# Altium PCB steering-wheel.PcbDoc
Units mm, origin at the board's own origin, x right, y up, seen from the top; angles counter-clockwise.
Board outline 106.25 x 90.25 mm, 2 copper layers (Top Layer, Bottom Layer), stack 1.671 mm thick; 77 components, 62 nets, 238 pads, 89 vias.
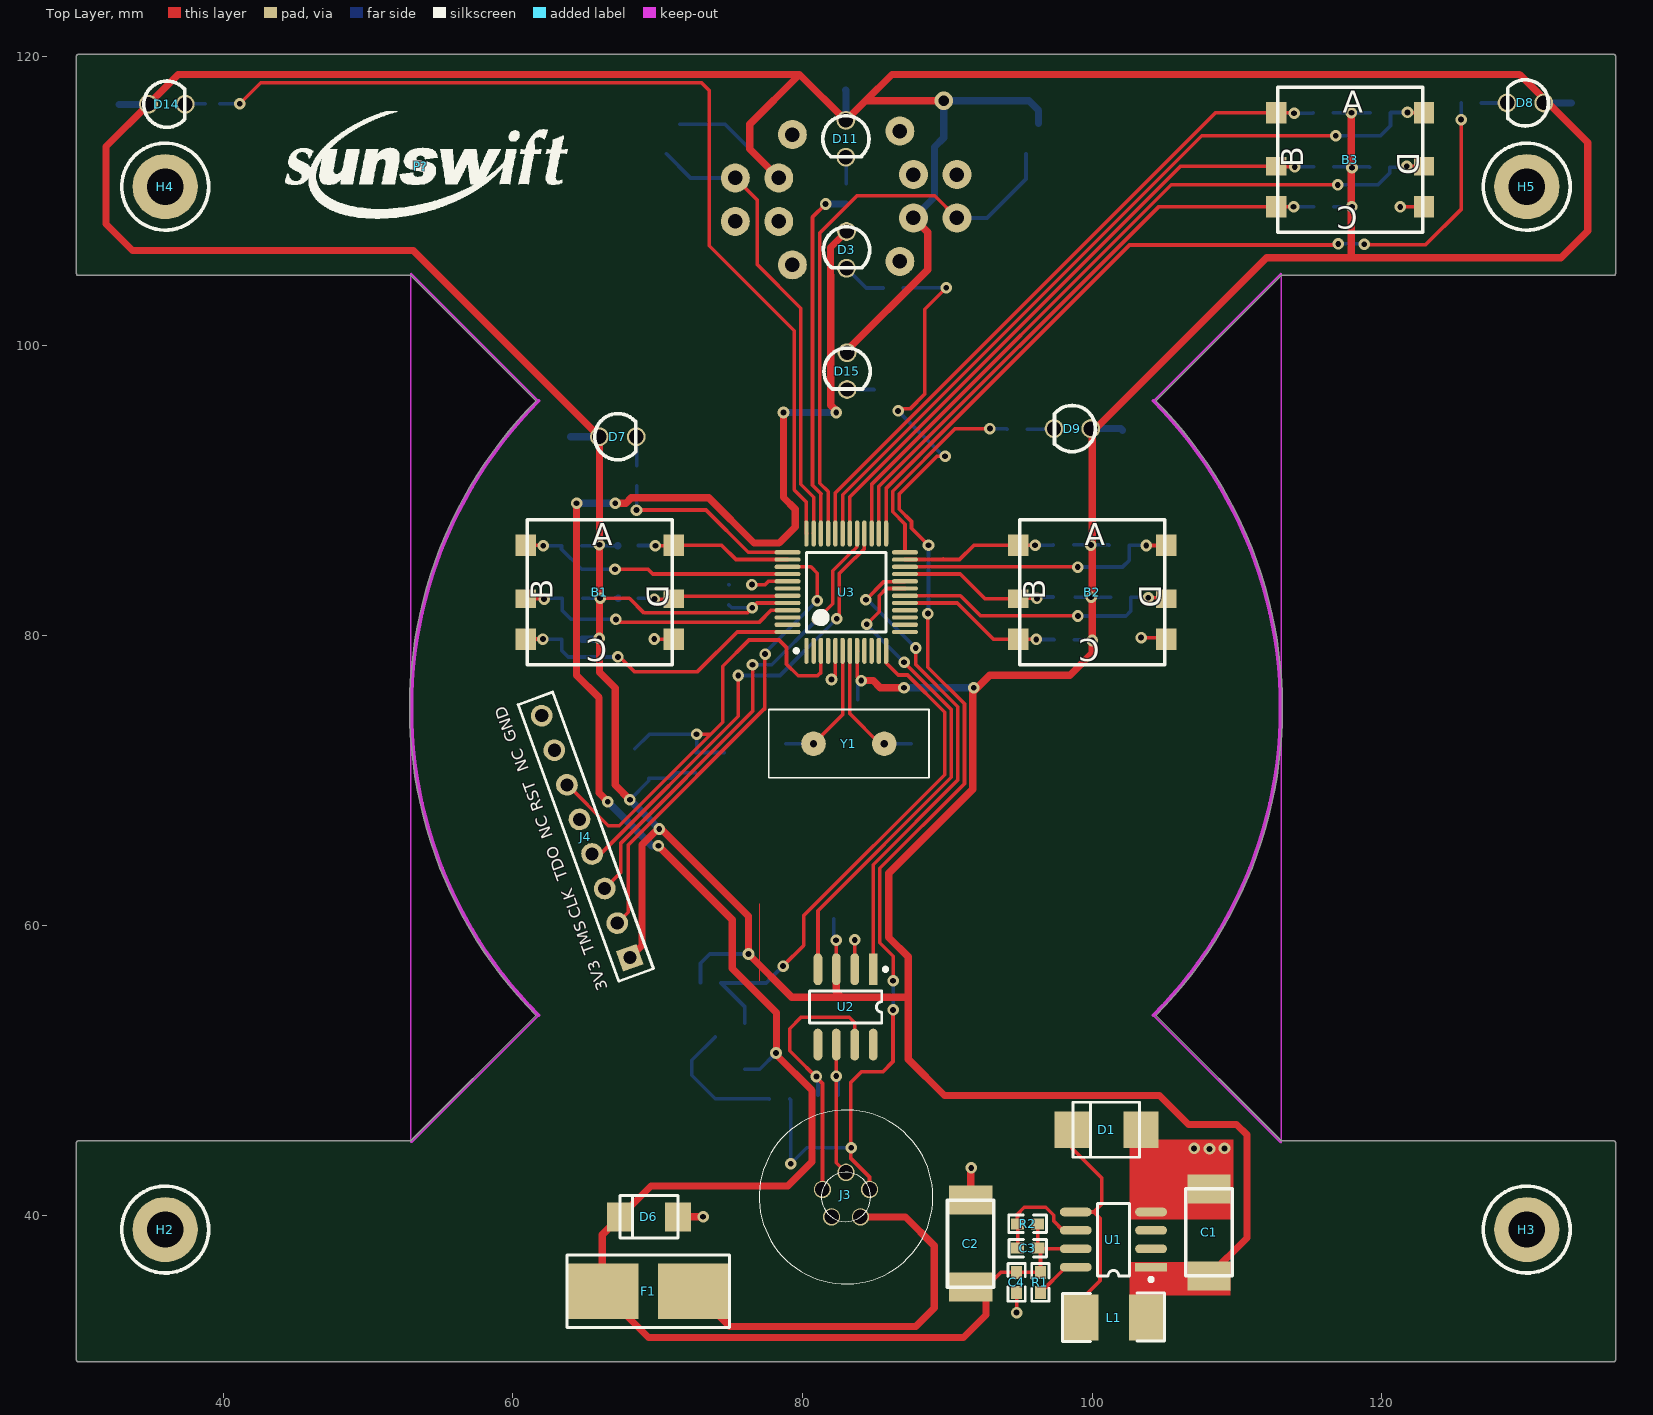
[diagram p0: Top Layer view]
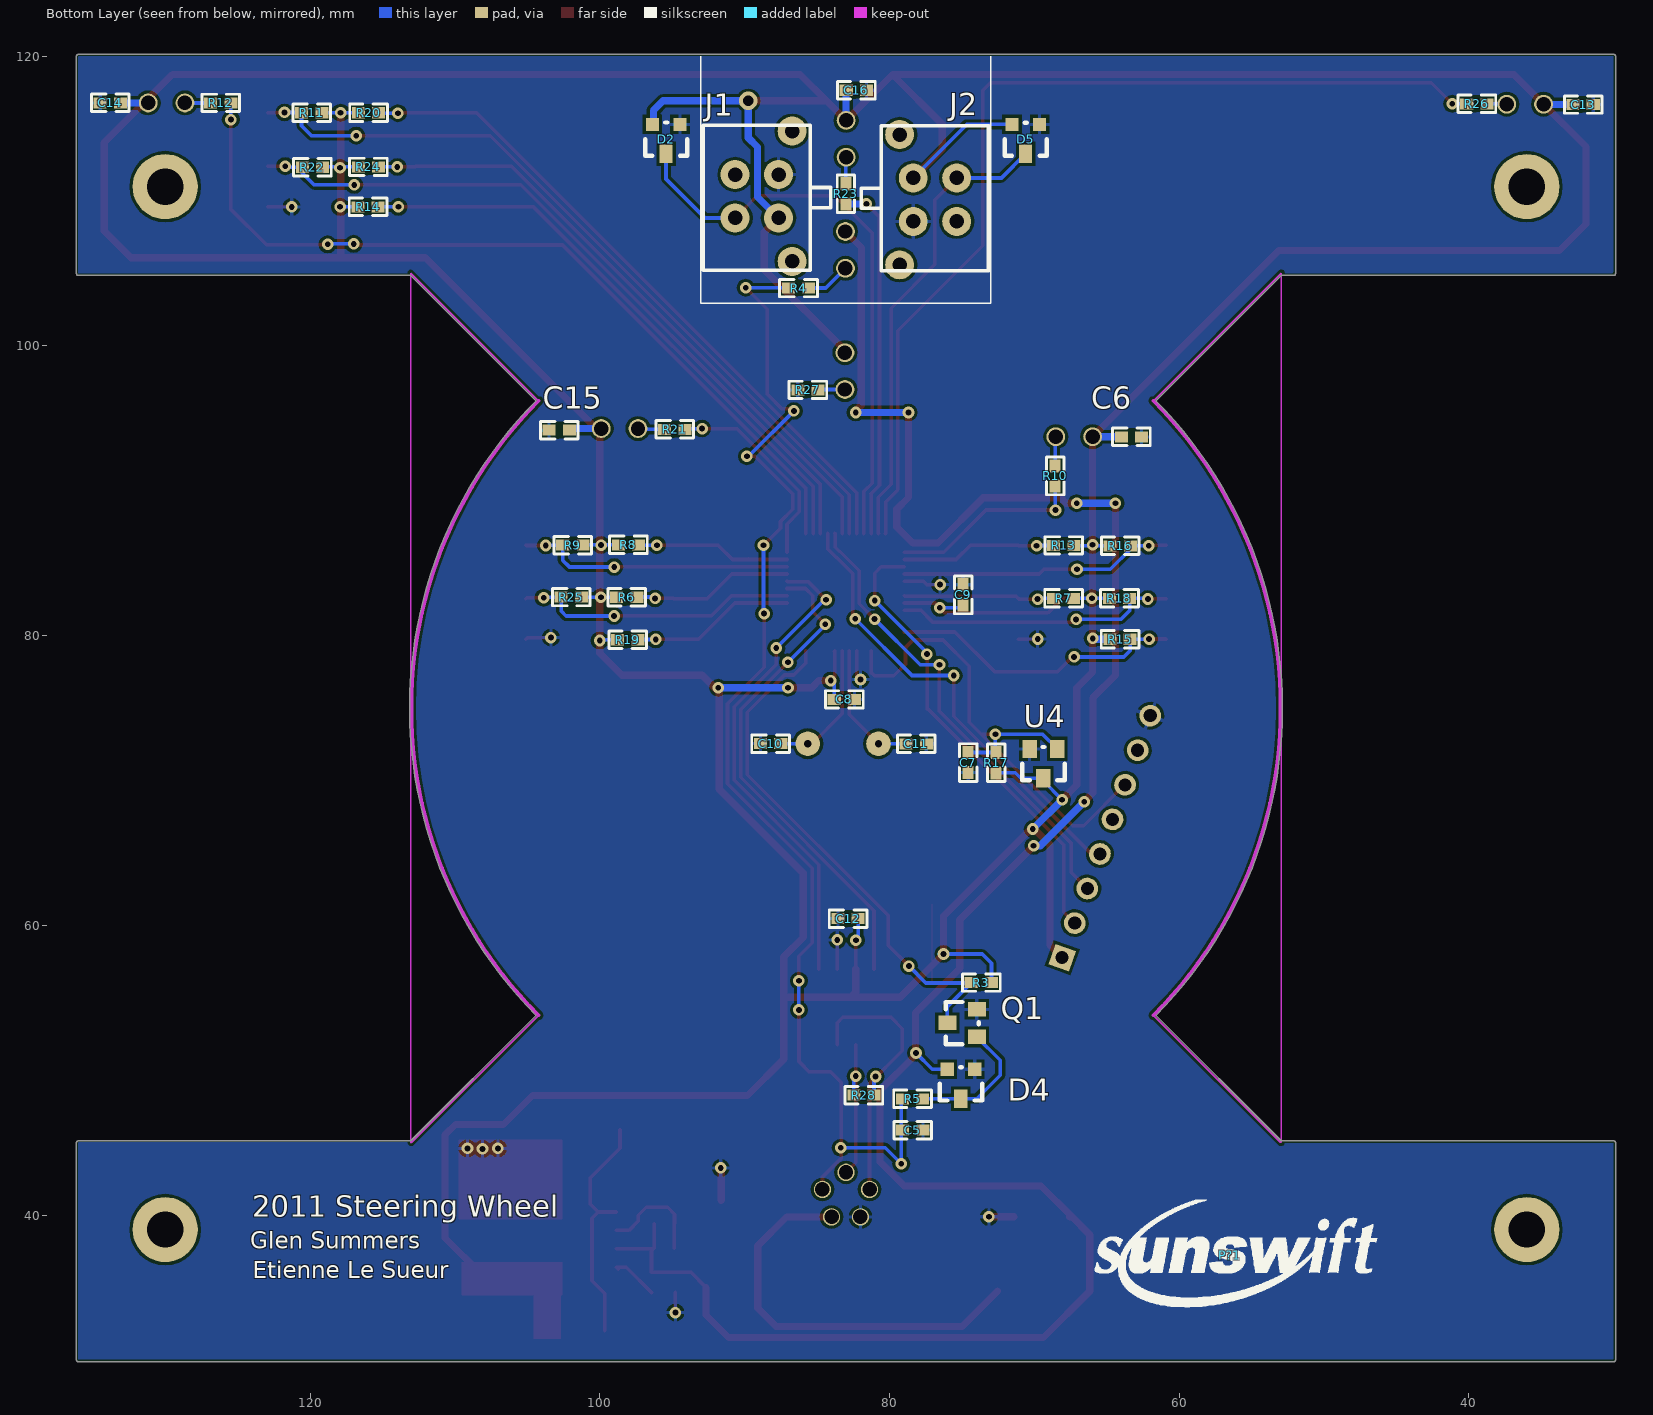
[diagram p1: Bottom Layer view, seen from below]

## Layer stack, top to bottom
Top Layer: signal copper 0.0356
Dielectric: core 1.6, FR-4, Dk 4.8
Bottom Layer: signal copper 0.0356

## Board outline
30,29.873 cw(c30,30) 29.873,30 29.873,45 cw(c30,45) 30,45.127 52.947,45.127 61.607,53.787 cw(c83,75) 61.607,96.213 52.947,104.873 30,104.873 cw(c30,105) 29.873,105 29.873,120 cw(c30,120) 30,120.127 136,120.127 cw(c136,120) 136.127,120 136.127,105 cw(c136,105) 136,104.873 113.053,104.873 104.393,96.213 cw(c83,75) 113.127,75 cw(c83,75) 104.393,53.787 113.053,45.127 136,45.127 cw(c136,45) 136.127,45 136.127,30 cw(c136,30) 136,29.873

## Design rules (kind name [scope] priority, off if disabled: settings)
Clearance [All] p1: gap=0.2
ComponentClearance [All] p1: gap=0.1 collisioncheckmode=3 verticalgap=0.254 showdistances=FALSE
PolygonConnect [All] p1: connectstyle=Relief reliefconductorwidth=0.254 reliefentries=4 polygonreliefangle="90 Angle"
RoutingVias [All] p1: holewidth=0.4 width=0.8 viastyle="Through Hole" minholewidth=0.4 minwidth=0.8 maxholewidth=0.4 maxwidth=0.8
SilkscreenOverComponentPads [All] p1: minsilkscreentomaskgap=0.254
SolderMaskExpansion [All] p1: expansion=0.102
Width [All] p1: maxlimit=5 minlimit=0.254 preferedwidth=0.254 minimp=50.000000 maximp=50.000000 favimp=50.000000
26 further rules are at their usual default settings.

## Classes and differential pairs
component class LPC: C7 C8 C9 C10 C11 C12 C13 C14 C15 C16 C27 J4 R17 U3 U4 Y1
component class PWR: C6 D6 F1 J3 R28 U2
component class steering-wheel: D7 D8 D9 D11 D14 D15 H2 H3 H4 H5 P2 R10 R12 R21 R23 R26 R27
component class U_3V-Switcher-50mA: C1 C2 C3 C4 D1 L1 R1 R2 U1
component class U_buttons: B1 B2 B3 R6 R7 R8 R9 R11 R13 R14 R15 R16 R18 R19 R20 R22 R24 R25
component class U_IO: C5 D2 D3 D4 D5 J1 J2 Q1 R3 R4 R5

## Components (designator, comment, footprint, x,y, rotation, side; value= is the part's Value field where it differs from the comment)
B1 "SKQU" SKQU 66,83 r0 top
B2 "SKQU" SKQU 100,83 r0 top
B3 "SKQU" SKQU 117.807,112.854 r0 top
C1 "4u7 35V" MCCT-CASEC 108.061,35.809 r90 top
C2 "4u7 35V" MCCT-CASEC 91.606,35.027 r90 top
C3 "1n" 0603 96.252,37.717 r180 top
C4 "100nF" 0603 94.777,36.051 r270 top
C5 "100nF" 0603 79.089,45.864 r180 bottom
C6 "100nF" 0603 62.597,93.727 r0 bottom
C7 "10nF" 0603 74.564,71.942 r270 bottom
C8 "100nF" 0603 83.81,75.6 r180 bottom
C9 "100nF" 0603 74.912,83.517 r270 bottom
C10 "18pF" 0603 87.505,72.549 r0 bottom
C11 "18pF" 0603 78.853,72.535 r180 bottom
C12 "CAP" 0603 82.159,60.467 r0 bottom
C13 "CAP" 0603 32.811,116.668 r180 bottom
C14 "CAP" 0603 133.091,116.783 r0 bottom
C15 "CAP" 0603 102.096,94.186 r0 bottom
C16 "CAP" 0603 82.983,117.656 r180 bottom
D1 "D SCHOTTKY" SMB 100.984,45.891 r180 top
D2 "BAV99" "dual  diode" 95.36,114.499 r180 bottom
D3 "Brake LED" "3mm LED" 83.036,106.804 r0 top
D4 "BAV99" "dual  diode" 75.01,49.271 r180 bottom
D5 "BAV99" "dual  diode" 70.536,114.499 r180 bottom
D6 "12V Transient Suppressor" SMA 69.397,39.881 r180 top
D7 "DIODE" "3m Diode" 65.875,90.036 r90 top
D8 "DIODE" "3mm LED" 130.074,116.779 r270 top
D9 "DIODE" "3m Diode" 100,98 r270 top
D11 "DIODE" "3m Diode" 79.292,115.674 r0 top
D14 "DIODE" "3m Diode" 34.743,112.991 r90 top
D15 "DIODE" "3m Diode" 79.372,99.636 r0 top
F1 "125mA/3A" LITTELFUSE-154 69.352,34.744 r180 top
H2 "HOLE" M2.5 36,39 r0 top
H3 "HOLE" M2.5 130,39 r0 top
H4 "HOLE" M2.5 36,111 r0 top
H5 "HOLE" M2.5 130,111 r0 top
J1 "CON4" MICROFIT-4-VERT 90.658,111.838 r270 bottom
J2 "CON4" MICROFIT-4-VERT 75.358,108.6 r90 bottom
J3 "CON5" ENG.1B.305.CLL 83,41.25 r0 top
J4 "LPC SWD Connector" HDR1X8 68.076,57.771 r110 top
L1 "330uH" 1812 99.229,32.926 r0 top
P? "SUN_LOGO" SUNSWIFTLOGO 53.597,112.404 r0 top
P?1 "SUN_LOGO" SUNSWIFTLOGO 56.515,37.214 r180 bottom (schematic designator P?)
Q1 "2N7002" SOT23-3 73.968,52.3 r90 bottom
R1 "100k" 0603 96.427,34.651 r90 top
R2 "1R2" 0603 96.234,39.396 r180 top
R3 "10k" 0603 74.353,56.05 r180 bottom
R4 "10k" 0603 85.577,104 r0 bottom
R5 "10k" 0603 79.106,48.029 r180 bottom
R6 "10k" 0603 98.838,82.653 r180 bottom
R7 "10k" 0603 67.279,82.581 r0 bottom
R8 "10k" 0603 97.319,86.271 r0 bottom
R9 "10k" 0603 101.158,86.249 r0 bottom
R10 "1K" 0603 68.56,90.332 r90 bottom
R11 "10k" 0603 119.191,116.103 r0 bottom
R12 "1K" 0603 125.47,116.779 r0 bottom
R13 "10k" 0603 67.264,86.23 r0 bottom
R14 "10k" 0603 116.692,109.607 r180 bottom
R15 "10K" 0603 64.78,79.755 r180 bottom
R16 "10k" 0603 64.762,86.204 r180 bottom
R17 "10k" 0603 72.632,71.934 r270 bottom
R18 "10k" 0603 64.818,82.576 r180 bottom
R19 "10k" 0603 98.761,79.72 r180 bottom
R20 "10k" 0603 116.661,116.103 r180 bottom
R21 "1K" 0603 94.118,94.246 r0 bottom
R22 "10k" 0603 119.139,112.339 r0 bottom
R23 "1K" 0603 83.007,109.803 r90 bottom
R24 "10k" 0603 115.269,112.363 r0 bottom
R25 "10k" 0603 101.265,82.664 r0 bottom
R26 "1K" 0603 40.145,116.719 r180 bottom
R27 "1K" 0603 86.327,96.969 r180 bottom
R28 "RES1" 0603 82.462,48.281 r180 bottom
U1 "LTC1474" SO8 101.461,38.309 r90 top
U2 "SN65HVD232" SO8 82.968,54.369 r180 top
U3 "LPC11C14" QFP48-long 82.33,83.005 r90 top
U4 "XC61CN2002MR" SOT23-3 68.42,72.188 r0 bottom
Y1 "12 MHz" HC49/4H 77.672,72.545 r0 top

## Footprints (in the part's own frame and the unit in brackets; to place one, negate y for a bottom-side part, rotate by r counter-clockwise, add the part's x,y. Pads: shape width x height; smd on the part's side, far side on the other; paste and mask are expansions set on the pad)
"3m Diode" [mm]
  round 1.3 hole 1: A(3.7,-0.1) K(3.7,-2.64)
  silkscreen extent 2.1,-2.6 5.3,0.22
"3mm LED" [mm]
  round 1.3 hole 1: A(0,1.1) K(0,-1.44)
  silkscreen extent -1.6,-1.4 1.6,1.42
0603 [mil]
  rect 35.43x30 smd: 1(0,0) 2(55,0)
  silkscreen extent -24,-24 79,24
1812 [mm]
  rect 2.4x3.2 smd: 1(0,0) 2(4.5,0)
  silkscreen extent -1.27,-1.66 5.77,1.7
"dual  diode" [mil]
  rect 36x36 smd: 1(35.43,31.5) 2(-39.57,31.5)
  rect 36x50 smd: 3(-2.57,-48.5)
  silkscreen extent -60,-54 55,36
ENG.1B.305.CLL [mm]
  round 1.2 hole 1: 1(0,1.7) 2(-1.625,0.525) 3(-1,-1.375) 4(1,-1.375) 5(1.625,0.525)
  silkscreen extent -6,-6 6,6
HC49/4H [mm]
  round 1.7 hole 0.5: 1(3.085,0) 2(7.965,0)
  silkscreen extent 0,-2.35 11.05,2.35
HDR1X8 [mm] "Connector; Header; 8 Position"
  rect 1.5x1.5 hole 0.9: 1(0,0)
  round 1.5 hole 0.9: 2(2.54,0) 3(5.08,0) 4(7.62,0) 5(10.16,0) 6(12.7,0) 7(15.24,0) 8(17.78,0)
  silkscreen extent -1.27,-1.27 19.05,1.27
LITTELFUSE-154 [mm]
  rect 5x3.81 smd: 1(-3.185,0) 2(3.185,0)
  silkscreen extent -5.6,-2.51 5.6,2.5
M2.5 [mm]
  round 4.5 hole 2.5: 1(0,0)
  silkscreen extent -3,-3 3,3
MCCT-CASEC [mm]
  rect 2x3 smd: 1(0,0) 2(6,0)
  silkscreen extent 0,-1.6 6,1.6
MICROFIT-4-VERT [mm]
  round 2 hole 1: 0(-3,3.94) 0(6,3.94) 1(0,0) 2(0,3) 3(3,0) 4(3,3)
  silkscreen extent -3.4,-2.2 6.6,6.6
QFP48-long [mm]
  oval 1.8x0.3 smd: 1(-4.048,2.063) 2(-4.048,1.563) 3(-4.048,1.063) 4(-4.048,0.563) 5(-4.048,0.063) 6(-4.048,-0.437) 7(-4.048,-0.937) 8(-4.048,-1.437) 9(-4.048,-1.937) 10(-4.048,-2.437) 11(-4.048,-2.937) 12(-4.048,-3.437) 25(4.052,-3.437) 26(4.052,-2.937) 27(4.052,-2.437) 28(4.052,-1.937) 29(4.052,-1.437) 30(4.052,-0.937) 31(4.052,-0.437) 32(4.052,0.063) 33(4.052,0.563) 34(4.052,1.063) 35(4.052,1.563) 36(4.052,2.063)
  oval 0.3x1.8 smd: 13(-2.748,-4.737) 14(-2.248,-4.737) 15(-1.748,-4.737) 16(-1.248,-4.737) 17(-0.748,-4.737) 18(-0.248,-4.737) 19(0.252,-4.737) 20(0.752,-4.737) 21(1.252,-4.737) 22(1.752,-4.737) 23(2.252,-4.737) 24(2.752,-4.737) 37(2.752,3.363) 38(2.252,3.363) 39(1.752,3.363) 40(1.252,3.363) 41(0.752,3.363) 42(0.252,3.363) 43(-0.248,3.363) 44(-0.748,3.363) 45(-1.248,3.363) 46(-1.748,3.363) 47(-2.248,3.363) 48(-2.748,3.363)
  silkscreen extent -4.17,-3.44 2.75,2.89, body extent -3.5,-4.19 3.5,2.81, height 1.6
SKQU [mm] "4 way hat switch plus centre push"
  rect 1.4x1.5 smd: 1(-5.1,3.25) 3(-5.1,-3.25) 4(5.1,-3.25) 6(5.1,3.25)
  rect 1.4x1.3 smd: 2(-5.1,-0.45) 5(5.1,-0.45)
  silkscreen extent -5,-5 5,5
SMA [mm]
  rect 1.8x2 smd: A(-2,0) K(2,0)
  silkscreen extent -2,-1.48 2,1.48
SMB [mm]
  rect 2.4x2.5 smd: A(-2.385,0) K(2.385,0)
  silkscreen extent -2.28,-1.9 2.3,1.9
SO8 [mm]
  rect 0.6x2.2 smd: 1(-1.905,-2.6)
  oval 0.6x2.2 smd: 2(-0.635,-2.6) 3(0.635,-2.6) 4(1.905,-2.6) 5(1.905,2.6) 6(0.635,2.6) 7(-0.635,2.6) 8(-1.905,2.6)
  silkscreen extent -2.88,-2.72 2.5,1.1
SOT23-3 [mm]
  rect 1x1.25 smd: 1(0,0) 2(1.905,0) 3(0.965,2.032)
  silkscreen extent -0.51,-0.13 2.41,2.16
SUNSWIFTLOGO [mm] "Sunswift Logo"
  silkscreen extent -9.32,-3.58 10.19,3.81

## Part data
B1 B2 B3: "Multi-directional switch"
C1 C2: library part "Cap Pol3", "Polarized Capacitor (Surface Mount)"
C3 C4 C5 C6 C7 C8 C9 C10 C11: library part CAP, "Capacitor"
C12 C13 C14 C15 C16: "Capacitor"
D1: "Schottky Diode"
D2 D4 D5: "Dual Diode"
D3: library part LED_HOLE, "through hole LED"
D6: library part DIODE, "Diode"
D7 D8 D9 D11 D14 D15: "Diode"
F1: library part FUSE2, "Fuse"
H2 H3 H4 H5: "Hole"
J1 J2 J3: "Connector"
J4: library part LPCLink_Connector
L1: library part Inductor, "Inductor"
Q1: library part N-MOSFET
R1 R2 R10 R12 R17 R21 R23 R26 R27: library part RES1, "Resistor"
R3 R4 R5 R6 R7 R8 R9 R11 R13 R14 R15 R16 R18 R19 R20 R22 R24 R25: library part RES, "Standard Resistor"
R28: "Resistor"
U1: "Step-down converter"
U2: "3.3V CAN Transciever"
U3: library part LPC11C14_Full
U4: library part XC61F, "SOT23 reset generator"
Y1: library part CRYSTAL, "Crystal"

## Via types
v1: diameter 0.8, hole 0.4, Top Layer to Bottom Layer, 88 vias
v2: diameter 1.27, hole 0.711, Top Layer to Bottom Layer, 1 vias

## Nets (pads, with @x,y where several pads share a name; then routed paths per layer and width w, separated by ;. In a path a pad name is that pad's centre, name@x,y a point inside that pad or via, vN(x,y) a via of type N, cw(c..) or ccw(c..) an arc to the next point about the centre after c; other vN are vias at no path point)
3V3: C1.1 C6.2 C8.1 C9.2 C12.1 C13.1 C14.1 C15.1 C16.1 D2.2 D5.2 D7.A D8.A D9.A D11.A D14.A D15.A J1.4 J2.4 J4.1 L1.2 R3.2 R6.1 R7.1 R8.2 R9.1 R11.1 R13.1 R14.1 R15.1 R16.1 R17.2 R18.1 R19.1 R20.1 R22.1 R24.2 R25.1 U1.1 U2.3 U3.8 U3.44 U4.3 | length 493.8
  Top Layer w0: 77.046,56.165 77.046,61.499
  Top Layer w0.254: v1(66.02,82.589) 68.047,82.589 69.063,81.573 76.174,81.573 v1(76.525,81.924) 76.858,82.257 U3.44 ; v1(82.313,58.978) 82.333,58.958 U2.3 U2.3@82.349,56.954 ; U3.8@83.791,78.934 U3.8 83.768,77.188 v1(84.057,76.899) ; C1.1@107.466,36.404 C1.1 ; 117.888,106.163 117.953,106.098 ; v1(117.924,109.607) v1@118.021,109.704
  Top Layer w0.5: J4.1 68.912,58.606 68.912,65.561 70.004,66.653 v1(70.105,66.653) 70.248,66.653 76.268,60.633 v1(76.268,58.026) 79.256,55.038 82.693,55.038 ; v1(68.08,68.678) 67.067,69.691 67.067,76.391 65.975,77.483 D7.A 53.124,106.587 33.748,106.587 31.92,108.415 31.92,113.768 D14.A 36.902,118.75 79.789,118.75 ; J2.4 76.351,113.606 76.351,115.313 79.789,118.75 ; U2.3 82.333,55.397 82.693,55.038 ; D15.A@82.992,99.617 88.637,105.262 88.637,107.859 J1.4 ; D11.A 83.795,116.378 83.798,116.378 ; v1(84.057,76.899) 84.877,76.899 85.37,76.405 v1(87.005,76.405) ; 84.341,116.924 84.343,116.924 ; v2(89.753,116.924) 84.343,116.924 ; v1(91.816,76.405) v1@91.936,76.286 ; D9.A 100.007,94.193 D9.A@100.007,94.069 ; C1.1 110.677,38.425 110.677,45.54 109.96,46.258 106.648,46.258 104.65,48.256 89.8,48.256 87.294,50.761 87.294,55.038 ; 117.888,106.163 v1(117.888,116.103) ; 79.789,118.75 82.98,115.56 83.798,116.378 ; 82.693,55.038 87.294,55.038 ; 83.798,116.378 84.343,116.924 ; 84.343,116.924 86.17,118.75 129.505,118.75 134.204,114.051 134.204,107.938 132.365,106.098 117.953,106.098 112.037,106.098 D9.A@100.007,94.069 ; 87.294,55.038 87.294,57.829 85.958,59.165 85.958,63.608 91.754,69.404 91.754,76.103 92.919,77.269 98.466,77.269 100.007,78.811 v1(100.007,79.665) D9.A@100.007,94.069
  Bottom Layer w0.254: R16.1 R13.1@67.238,86.204 ; R18.1 R7.1@67.274,82.576 ; R7.1@67.075,82.608 R7.1@67.083,82.601 ; v1(68.08,68.678) 69.385,69.984 U4.3 70.934,70.156 71.315,70.537 R17.2 ; D5.2 74.658,115.299 J2.4 ; R3.2 72.956,57.381 73.6,58.026 v1@76.542,58.026 ; C9.2 75.108,81.924 v1(76.525,81.924) ; C12.1 82.159,59.132 v1(82.313,58.978) ; C8.1 83.81,76.653 v1(84.057,76.899) ; R8.2 101.136,86.271 R9.1 ; R19.1 v1@99.952,79.72 ; R6.1 98.849,82.664 R25.1 ; v1@99.821,79.876 v1@99.886,79.811 ; R20.1 v1(117.888,116.103) R11.1 ; R24.2 119.114,112.363 R22.1 ; R14.1 v1(117.924,109.607)
  Bottom Layer w0.5: C13.1 34.82,116.668 D14.A ; C6.2 65.966,93.727 D7.A ; R15.1 65.908,79.755 v1(65.965,79.812) ; R13.1@67.238,86.204 R13.1 ; R7.1@67.274,82.576 R7.1 ; v1(68.08,68.678) v1(70.105,66.653) ; C16.1 82.992,117.647 D11.A ; v1(87.005,76.405) v1(91.816,76.405) ; J1.4 89.109,110.29 89.109,113.74 89.753,114.384 v2(89.753,116.924) 95.638,116.924 96.298,116.263 D2.2@96.298,115.362 ; D9.A 101.982,94.3 C15.1 ; v1@99.952,79.72 v1(100.007,79.665) ; D8.A 131.179,116.783 C14.1
  other v1: 99.919,82.657 99.908,86.254 65.979,86.272 117.934,112.302
12V: C2.1 C3.1 C4.1 D3.A D4.2 D6.K F1.2 R1.2 R2.1 U1.7 | length 158.3
  Top Layer w0.254: C2.1@92.661,35.009 93.701,36.048 C4.1@94.78,36.048 ; C4.1 C4.1@94.78,36.048 ; R2.1 96.234,37.735 C3.1 C3.1@96.296,37.674 ; U1.7 C3.1@96.296,37.674 ; C4.1@94.78,36.048 R1.2 96.427,37.543 C3.1@96.296,37.674
  Top Layer w0.5: v1@64.402,89.159 64.402,77.274 65.957,75.719 65.957,69.133 v1(66.555,68.534) ; v1@67.071,89.272 v1(67.071,89.146) 67.804,89.146 68.182,89.524 73.529,89.524 76.649,86.404 78.383,86.404 79.489,87.51 79.489,88.737 78.687,89.539 v1(78.687,95.406) ; D6.K@67.561,39.881 D6.K ; v1(70.046,65.493) 75.153,60.385 75.153,57.032 78.21,53.975 78.21,51.058 80.657,48.611 80.657,43.69 78.983,42.016 69.532,42.016 D6.K ; v1@82.334,95.531 81.948,95.917 81.948,104.897 81.936,104.908 81.936,106.804 D3.A ; C2.1@92.661,35.009 92.661,33.097 91.108,31.544 69.367,31.544 F1.2 66.167,38.651 D6.K
  Bottom Layer w0.254: D4.2 77.045,50.071 v1(78.167,51.193)
  Bottom Layer w0.5: v1(64.399,89.146) v1(67.071,89.146) ; v1(66.555,68.534) 69.597,65.493 v1(70.046,65.493) ; v1@78.64,95.411 v1(82.334,95.411)
/RESET: C7.1 J4.6 R17.1 U3.3 U4.1 | length 38.4
  Top Layer w0.254: J4.6@63.751,69.723 66.586,66.887 67.352,66.887 73.663,73.198 ; v1(72.686,73.198) 73.663,73.198 ; U3.3 81.268,77.457 81.041,77.23 79.699,77.23 78.894,78.035 78.894,79.184 78.379,79.699 76.296,79.699 74.487,77.89 74.487,74.022 73.663,73.198
  Bottom Layer w0.254: U4.1 69.43,73.198 v1(72.686,73.198) 72.686,71.988 R17.1@72.639,71.942 ; R17.1 R17.1@72.639,71.942 ; C7.1@74.576,71.93 C7.1 R17.1@72.639,71.942
BRAKECUTOUT: C5.1 J3.5 R4.2 R5.1 | length 86.7
  Top Layer w0.254: J3.5 84.625,42.636 83.384,43.877 83.358,43.877 83.323,43.913 83.323,49.158 84.065,49.901 85.551,49.901 86.247,50.597 v1@86.247,54.264 ; v1(86.254,56.174) 86.254,57.87 85.327,58.797 85.327,63.938 91.177,69.787 91.177,75.298 88.65,77.825 88.65,81.525 v1(88.654,81.529) ; v1(86.596,95.518) 86.596,95.658 87.413,95.658 88.435,96.68 88.435,102.535 v1(89.925,104.025) ; v1(88.696,86.24) 87.522,87.414 87.522,87.89 86.676,88.736 86.676,89.784 89.276,92.384 v1(89.839,92.384)
  Bottom Layer w0.254: R5.1 79.182,47.953 v1(79.182,43.545) 80.284,44.647 v1(83.362,44.647) ; v1(86.254,54.165) v1(86.254,56.174) ; v1(86.596,95.518) 89.729,92.384 v1(89.839,92.384) ; R4.2 86.99,104.015 v1@89.925,104.015 ; v1(88.654,81.529) 88.696,81.529 v1(88.696,86.24)
CAN_H: J3.2 R28.2 U2.7 | length 19.8
  Top Layer w0.254: J3.2 81.375,49.088 79.11,51.353 79.11,52.872 79.889,53.65 83.219,53.65 83.603,53.266 U2.7
  Bottom Layer w0.254: v1(80.957,49.569) 81.065,49.461 R28.2
CAN_L: J3.1 R28.1 U2.6 | length 10.5
  Top Layer w0.254: U2.6 82.333,43.617 J3.1
  Bottom Layer w0.254: v1(82.329,49.593) 82.462,49.46 R28.1
CRUISE: R23.1 U3.34 | length 24.8
  Top Layer w0.254: U3.34 81.268,89.785 81.278,89.795 80.689,90.384 80.689,108.897 v1(81.595,109.803)
  Bottom Layer w0.5: v1(81.595,109.803) R23.1
GND: B1.4 B2.4 B3.4 C1.2 C2.2 C4.2 C5.2 C6.1 C7.2 C8.2 C9.1 C10.2 C11.2 C12.2 C13.2 C14.2 C15.2 C16.2 D1.A D2.1 D4.1 D5.1 D6.A J1.2 J2.2 J3.3 J4.8 Q1.2 R27.1 U1.4 U2.2 U3.5 U3.41 U4.2 | length 16.9
  Top Layer w0.254: v1(69.769,79.771) 69.789,79.75 B1.4 ; v1(76.505,83.527) 77.422,83.527 77.652,83.757 U3.41 ; v1(81.997,76.977) 82.268,77.248 U3.5 ; U2.2 v1(83.603,58.996) ; v1(94.777,33.266) C4.2 ; v1(103.37,79.865) 104.985,79.865 B2.4 ; v1(121.269,109.604) B3.4
  Top Layer w0.5: D6.A v1(73.136,39.881) ; C2.2 91.606,43.21 v1(91.651,43.255)
  Bottom Layer w0.254: C9.1 C9.1@74.922,83.527 ; v1(83.603,58.996) v1@83.622,59.015 ; v1(94.777,33.266) v1@94.789,33.254 ; v1@121.22,109.652 v1(121.269,109.604)
  other v1: 108.095,44.569 107.032,44.607 109.131,44.607
LEFT_LED: R26.1 U3.36 | length 68.3
  Top Layer w0.254: v1@41.157,116.713 v1(41.15,116.72) ; v1@41.422,116.72 v1(41.15,116.72) ; U3.36 80.263,87.061 80.263,89.231 79.43,90.064 79.43,101.052 73.563,106.918 73.563,117.638 73.028,118.173 42.603,118.173 v1(41.15,116.72)
  Bottom Layer w0.254: R26.1@39.77,116.72 v1(41.15,116.72)
NetB1_1: B1.1 R16.2 U3.40 | length 19
  Top Layer w0.254: B1.1 v1@62.081,86.25 ; v1(67.051,84.586) 69.333,84.586 69.663,84.257 U3.40
  Bottom Layer w0.254: v1(62.105,86.203) 62.106,86.204 R16.2 63.365,85.975 64.753,84.586 v1(67.051,84.586)
NetB1_2: B1.2 R18.2 U3.45 | length 19.6
  Top Layer w0.254: B1.2@60.904,82.554 B1.2 v1@62.179,82.55 ; v1(67.114,81.127) 67.323,80.919 76.989,80.919 77.827,81.757 U3.45
  Bottom Layer w0.254: v1(62.161,82.533) 62.204,82.576 R18.2 63.421,81.725 64.019,81.127 v1(67.114,81.127)
NetB1_3: B1.3 R15.2 U3.48 | length 20.6
  Top Layer w0.254: B1.3 60.917,79.767 v1(62.075,79.767) ; v1@67.311,78.592 68.382,77.52 72.755,77.52 75.491,80.257 U3.48
  Bottom Layer w0.254: v1(62.075,79.767) 62.088,79.755 R15.2 63.383,78.976 63.833,78.526 67.245,78.526 v1(67.252,78.533)
NetB1_5: B1.5 R7.2 U3.43 | length 10.5
  Top Layer w0.254: v1(69.774,82.526) 71.076,82.526 B1.5 ; B1.5@71.069,82.581 B1.5 ; U3.43 78.945,82.734 71.284,82.734 B1.5
  Bottom Layer w0.254: R7.2 69.719,82.581 v1(69.774,82.526)
NetB1_6: B1.6 R13.2 U3.38 | length 10.7
  Top Layer w0.254: v1(69.845,86.216) B1.6@71.066,86.216 ; B1.6 74.412,86.25 75.405,85.257 U3.38
  Bottom Layer w0.254: R13.2 69.831,86.23 v1(69.845,86.216)
NetB2_1: B2.1 R8.1 U3.23 | length 10.7
  Top Layer w0.254: U3.23 89.678,85.257 ; 89.723,85.302 89.678,85.257 ; v1(96.057,86.25) B2.1 91.833,86.25 90.84,85.257 89.678,85.257
  Bottom Layer w0.254: v1(96.057,86.25) 97.297,86.25 R8.1
NetB2_2: B2.2 R6.2 U3.21 | length 10.8
  Top Layer w0.254: U3.21 90.882,84.257 92.589,82.55 B2.2 94.927,82.577 v1(96.179,82.577)
  Bottom Layer w0.254: v1@96.304,82.665 R6.2@97.292,82.665
NetB2_3: B2.3 R19.2 U3.17 | length 11.3
  Top Layer w0.254: U3.17 90.677,82.257 93.184,79.75 B2.3 96.127,79.75 v1(96.135,79.742)
  Bottom Layer w0.254: v1(96.135,79.742) 97.343,79.742 R19.2
NetB2_5: B2.5 R25.2 U3.18 | length 19.7
  Top Layer w0.254: U3.18 90.898,82.757 92.286,81.369 98.996,81.369 v1(99.009,81.357) ; v1(103.872,82.618) 105.032,82.618 B2.5
  Bottom Layer w0.254: v1(99.009,81.357) 102.286,81.357 ; 102.311,81.348 102.662,81.699 R25.2 103.826,82.664 v1(103.872,82.618)
NetB2_6: B2.6 R9.2 U3.22 | length 19.3
  Top Layer w0.254: U3.22 98.981,84.757 v1(99.001,84.737) ; v1(103.725,86.226) 105.076,86.226 B2.6
  Bottom Layer w0.254: v1(99.001,84.737) 102.095,84.737 102.555,85.198 R9.2 103.702,86.249 v1(103.725,86.226)
NetB3_1: B3.1 R20.2 U3.32 | length 46.5
  Top Layer w0.254: U3.32 82.268,89.871 108.501,116.104 B3.1 112.717,116.094 v1@113.715,116.094
  Bottom Layer w0.254: v1(113.934,116.072) 115.233,116.072 R20.2
NetB3_2: B3.2 R24.1 U3.30 | length 43.9
  Top Layer w0.254: U3.30 83.268,89.587 106.085,112.404 B3.2 ; B3.2@112.745,112.366 v1(113.976,112.366)
  Bottom Layer w0.254: v1(113.976,112.366) 113.978,112.363 R24.1
NetB3_3: B3.3 R14.2 U3.26 | length 41.2
  Top Layer w0.254: U3.26 85.268,90.303 104.569,109.604 B3.3 112.712,109.608 v1@113.851,109.608
  Bottom Layer w0.254: v1(113.903,109.607) R14.2
NetB3_5: B3.5 R22.2 U3.27 | length 51.1
  Top Layer w0.254: U3.27 84.768,90.445 105.446,111.123 v1(116.953,111.123) ; v1@121.528,112.404 B3.5
  Bottom Layer w0.254: v1(116.953,111.123) 119.723,111.123 120.536,111.936 R22.2 121.641,112.339 v1(121.717,112.415)
NetB3_6: B3.6 R11.2 U3.31 | length 54.3
  Top Layer w0.254: U3.31 82.768,89.729 107.56,114.521 v1(116.813,114.521) ; v1(121.762,116.124) B3.6
  Bottom Layer w0.254: v1(116.813,114.521) 119.901,114.521 120.588,115.208 R11.2 120.609,116.124 v1(121.762,116.124)
NetC3_2: C3.2 R2.2 U1.6 | length 7.5
  Top Layer w0.254: C3.2 94.855,39.378 R2.2 94.837,40.066 95.309,40.538 96.786,40.538 97.339,39.984 97.339,39.594 97.989,38.944 U1.6
NetD1_K: D1.K L1.1 U1.5 | length 16.8
  Top Layer w0.254: D1.K 98.599,44.621 100.661,42.559 100.661,40.769 100.106,40.214 ; U1.5 100.106,40.214 ; L1.1@99.661,32.009 99.661,34.584 100.536,35.459 100.536,39.784 100.106,40.214
NetD3_K: D3.K R4.1 | length 3.1
  Bottom Layer w0.254: D3.K 84.4,104 R4.1
NetD4_3: D4.3 Q1.1 R5.2 | length 9.3
  Bottom Layer w0.254: Q1.1 72.357,50.688 72.357,49.648 73.966,48.039 D4.3 R5.2@77.679,48.039 ; R5.2@77.699,48.019 R5.2
NetD7_K: D7.K R10.2 | length 2
  Bottom Layer w0.254: R10.2 D7.K@68.56,93.691
NetD8_K: D8.K R12.2 | length 1.8
  Bottom Layer w0.254: R12.2 D8.K
NetD9_K: D9.K R21.2 | length 1.9
  Bottom Layer w0.254: R21.2 97.306,94.246 D9.K
NetD11_K: D11.K R23.2 | length 1.8
  Bottom Layer w0.254: D11.K 83.007,113.019 R23.2
NetD14_K: D14.K R26.2 | length 1.4
  Bottom Layer w0.254: D14.K 37.411,116.719 R26.2
NetD15_K: D15.K R27.2 | length 1.9
  Bottom Layer w0.254: D15.K 84.903,96.996 R27.2
NetF1_1: F1.1 J3.4 | length 28.3
  Top Layer w0.5: F1.1 74.973,32.308 87.814,32.308 89.091,33.585 89.091,37.886 87.102,39.875 J3.4
NetQ1_D: Q1.3 R3.1 U3.12 | length 36.7
  Top Layer w0.254: v1(78.658,57.192) 80.086,58.62 80.086,60.679 89.815,70.408 89.815,74.716 87.242,77.289 86.612,77.289 85.768,78.133 U3.12
  Bottom Layer w0.254: R3.1 R3.1@74.374,56.028 ; Q1.3 76,54.403 R3.1@74.374,56.028 ; v1(78.658,57.192) 77.494,56.028 R3.1@74.374,56.028
NetR1_1: R1.1 U1.8 | length 3.4
  Top Layer w0.254: R1.1 98.179,36.404 U1.8 U1.8@98.716,36.259
NetU2_1: U2.1 U3.20 | length 33.8
  Top Layer w0.254: v1(84.378,82.477) 84.378,82.482 85.629,83.734 87.045,83.734 U3.20 ; U2.1 84.873,64.183 90.723,70.032 90.723,75.092 87.81,78.005 v1(87.81,79.149)
  Bottom Layer w0.254: v1@84.43,82.529 v1(87.81,79.149)
NetU2_4: U2.4 U3.19 | length 34.4
  Top Layer w0.254: U2.4 81.063,61.015 90.269,70.22 90.269,74.904 v1(87.01,78.163) ; v1(84.427,80.783) 85.289,81.646 85.289,82.752 85.794,83.257 U3.19
  Bottom Layer w0.254: v1(84.427,80.783) 84.427,80.746 v1(87.01,78.163)
NetU3_1: U3.1
NetU3_2: U3.2
NetU3_4: U3.4
NetU3_9: U3.9
NetU3_10: U3.10
NetU3_11: U3.11
NetU3_13: U3.13
NetU3_14: U3.14
NetU3_15: U3.15
NetU3_16: U3.16
NetU3_42: U3.42
NetU3_46: U3.46
NetU3_47: U3.47
PADDLE_L: D5.3 J2.3 U3.35 | length 32.3
  Top Layer w0.254: J2.3 76.873,110.084 76.873,105.62 79.884,102.609 79.884,90.449 80.768,89.565 U3.35 U3.35@80.751,87.074
  Bottom Layer w0.254: D5.3 72.269,111.6 J2.3
PADDLE_R: D2.3 J1.3 U3.33 | length 40.3
  Top Layer w0.254: U3.33 81.768,89.947 81.19,90.525 81.19,107.795 83.763,110.367 89.128,110.367 J1.3
  Bottom Layer w0.254: J1.3@90.11,108.841 92.732,108.841 95.425,111.534 D2.3
PRCH: R21.1 U3.24 | length 14.3
  Top Layer w0.254: U3.24 87.068,87.702 86.222,88.548 86.222,89.973 90.546,94.297 v1(92.937,94.297)
  Bottom Layer w0.254: v1(92.937,94.297) 94.068,94.297 R21.1
REV: R10.1 U3.37 | length 13.3
  Top Layer w0.254: v1(68.534,88.674) 73.331,88.674 76.248,85.757 U3.37
  Bottom Layer w0.254: v1@68.56,88.7 R10.1
RIGHT_LED: R12.1 U3.25 | length 57.9
  Top Layer w0.254: U3.25 85.768,90.161 102.574,106.966 v1@116.988,106.966 ; v1@119.142,107.021 119.179,106.984 123.008,106.984 125.484,109.46 v1@125.484,115.688
  Bottom Layer w0.254: v1(116.988,107.051) 118.749,107.051 v1(118.783,107.017) ; v1(125.467,115.632) 125.47,115.634 R12.1
TCLK: J4.3 U3.29 | length 32.5
  Top Layer w0.254: J4.3 67.459,63.664 67.459,65.692 76.565,74.798 v1@76.565,77.992 ; v1(81.028,81.148) 82.084,82.203 82.084,84.489 83.425,85.83 83.465,85.83 83.745,86.109 83.745,87.034 U3.29
  Bottom Layer w0.254: v1(76.543,77.992) 77.873,77.992 v1(81.028,81.148)
TDO: J4.4 U3.28 | length 32
  Top Layer w0.254: J4.4 66.056,64.931 75.566,74.441 v1(75.566,77.252) ; v1(82.359,81.166) 82.538,81.345 82.538,84.296 83.617,85.376 83.653,85.376 84.268,85.99 U3.28
  Bottom Layer w0.254: v1(75.566,77.252) 78.445,77.252 v1(82.359,81.166)
TMS: J4.2 U3.39 | length 32.1
  Top Layer w0.254: J4.2 67.96,60.91 67.96,65.551 77.342,74.933 77.402,74.933 v1@77.402,78.733 ; U3.39 80.577,84.757 81.019,84.315 v1(81.019,82.424)
  Bottom Layer w0.254: v1(77.413,78.733) 77.413,78.817 v1(81.019,82.424)
XTALIN: C11.1 U3.6 Y1.1 | length 9.1
  Top Layer w0.254: Y1.1 82.768,74.555 U3.6
  Bottom Layer w0.254: C11.1 Y1.1@80.748,72.535
XTALOUT: C10.1 U3.7 Y1.2 | length 9.8
  Top Layer w0.254: U3.7 83.268,74.607 85.331,72.545 Y1.2 Y1.2@85.637,72.944
  Bottom Layer w0.254: Y1.2 85.642,72.549 C10.1
pads on no net: H2.1 H3.1 H4.1 H5.1 J1.0 J1.1 J2.0 J2.1 J4.5 J4.7 U1.2 U1.3 U2.5 U2.8

## Polygon pours and split planes (outlines as drawn)
GND on Bottom Layer "GND" (solid, remove dead copper, pour order 6): 30.028,120.023 30.028,105.117 29.982,105.071 30.014,105.038 52.942,105.038 52.942,45.021 52.867,44.946 30.015,44.946 30.015,30.092 30.038,30.068 30.071,30.035 136.006,30.035 136.006,44.991 135.993,45.003 135.955,45.042 113.048,45.042 113.048,105.029 113.068,105.009 135.988,105.009 135.988,119.965 136,119.977 135.961,120.016 30.026,120.016

## Keep-outs
Keep-Out Layer:
  lines w0.1: 52.937,45.016 52.942,45.021 ; 61.787,53.787 53.021,45.021 ; 61.787,96.213 61.767,96.213 52.942,105.038 52.942,45.021 ; 104.213,53.787 104.223,53.787 113.008,45.002 ; 104.213,96.213 104.233,96.213 113.048,105.029 113.048,45.042 113.008,45.002 ; 52.942,45.021 53.021,45.021 ; 52.942,45.021 53.021,45.021 ; 113.008,45.002 113.008,45.002
  lines w0.254: 61.787,53.787 cw(c83,75) 61.787,96.213 ; 104.213,53.787 ccw(c83,75) 104.213,96.213

## Other copper
Top Layer:
  region net GND: 109.761,39.709 109.761,45.209 102.561,45.209 102.561,39.709
  region net 3V3: 102.57,36.756 102.57,34.465 109.544,34.465 109.544,36.756
  region net 3V3: 102.683,35.239 102.683,31.456 104.561,31.456 104.561,35.239

## Silkscreen, mask and mechanical layers (free items; w line width, h text height)
Top Overlay:
  text "GND" at 60.354,72.825 h0.8 r110
  text "NC" at 61.13,70.775 h0.8 r110
  text "RST" at 62.117,68.067 h0.8 r110
  text "NC" at 62.803,66.165 h0.8 r110
  text "TDO" at 63.809,63.302 h0.8 r110
  text "CLK" at 64.803,60.647 h0.8 r110
  text "TMS" at 65.684,58.19 h0.8 r110
  text "3V3" at 66.595,55.666 h0.8 r110
Bottom Overlay:
  lines w0.1: 72.998,120 72.998,102.947 93.027,102.947 93.027,119.993
  text "2011 Steering Wheel" at 123.987,39.413 h2.5
  text "Glen Summers" at 124.114,37.247 h2
  text "Etienne Le Sueur" at 123.971,35.242 h2
Mechanical 1:
  lines w0.254: 104.213,53.787 ccw(c83,75) 104.213,96.213 ; 104.213,53.787 113,45 ; 104.213,53.787 113,45 ; 104.213,96.213 113,105 ; 104.213,96.213 113,105 ; 113,45 136,45 136,30 30,30 30,45 53,45 61.787,53.787 cw(c83,75) 61.787,96.213 53,105 30,105 30,120 136,120 136,105 113,105

## Text inside footprints (layer, text, board x,y; h text height)
B1: Top Overlay "A" at 65.475,86.25 h1.52; Top Overlay "B" at 62.75,82.475 h1.52 r90; Top Overlay "C" at 66.525,79.75 h1.52 r180; Top Overlay "D" at 69.25,83.525 h1.52 r270
B2: Top Overlay "A" at 99.475,86.25 h1.52; Top Overlay "B" at 96.75,82.475 h1.52 r90; Top Overlay "C" at 100.525,79.75 h1.52 r180; Top Overlay "D" at 103.25,83.525 h1.52 r270
B3: Top Overlay "A" at 117.282,116.104 h1.52; Top Overlay "B" at 114.557,112.329 h1.52 r90; Top Overlay "C" at 118.332,109.604 h1.52 r180; Top Overlay "D" at 121.057,113.379 h1.52 r270